# EAGLE board tractor_1v6 (EAGLE 9.0.1)
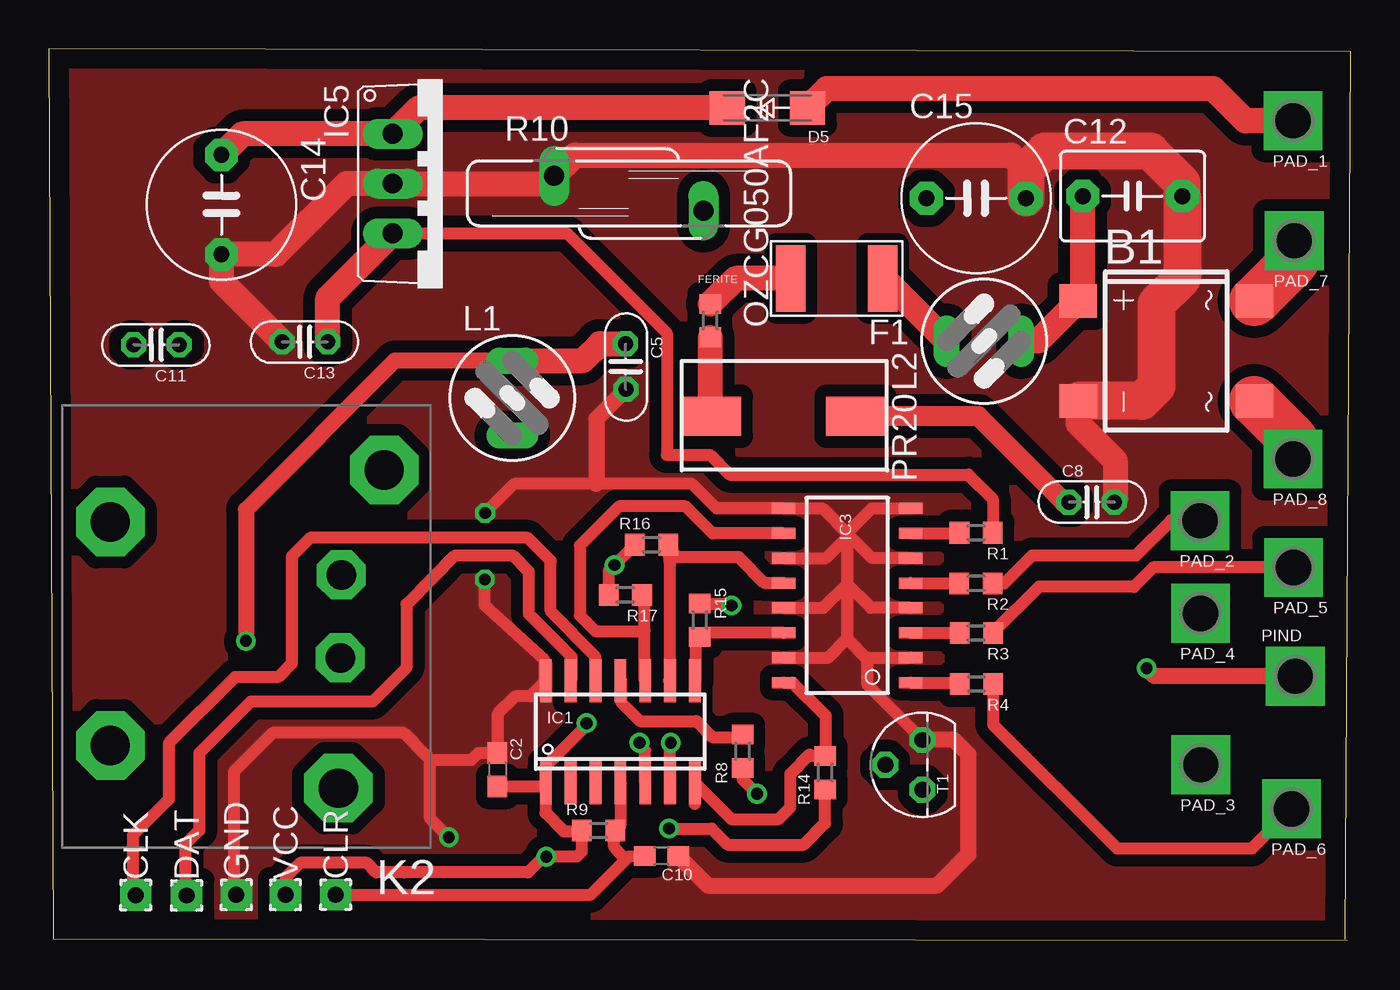
[diagram p0: board, top side]
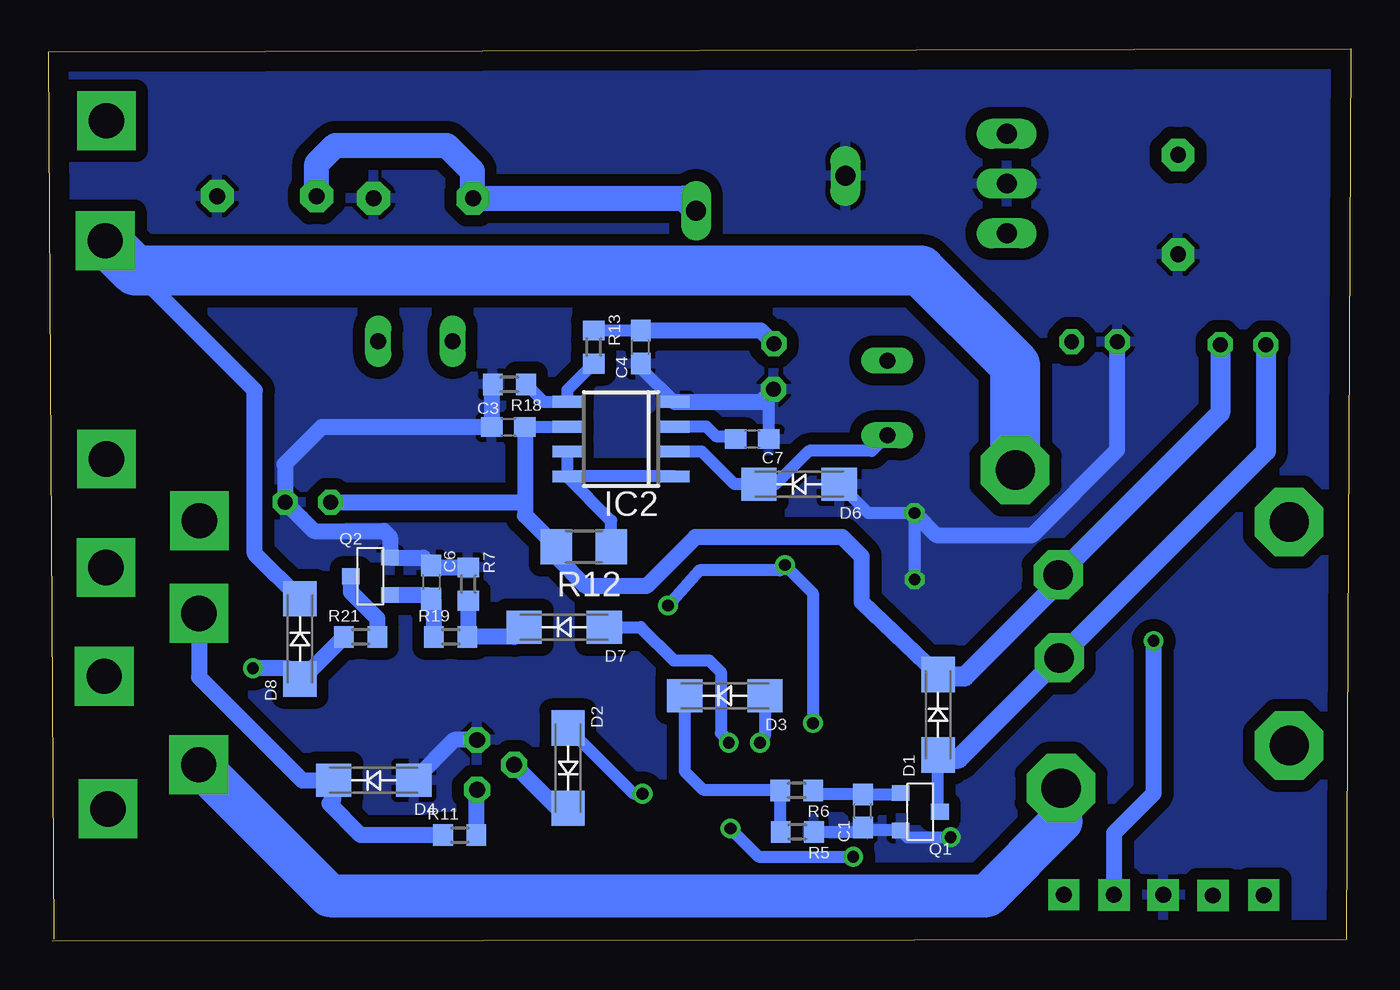
[diagram p1: board, bottom side, seen from below]

Size 66.48 x 45.52 mm. Coordinates in mm from the lower left corner, seen from the top.
Outline: 66.22,0.06 66.48,45.37 0,45.52 0.22,0.06 66.32,0
Copper layers (1*16): Top 0.035mm / dielectric 1.5mm / Bottom 0.035mm
Design rules "default": minimum track width 10mil, minimum drill 24mil, track to track 8mil, track to pad 8mil, pad to pad 8mil, via to via 8mil, smd to smd 8mil, copper to edge 40mil, drill to drill 8mil, minimum pad ring 10mil, minimum via ring 8mil, stop-mask expansion 4mil, vias tented up to drill 0mil, thermal gap 10mil

## Footprints (pad centres in the part's own frame; a part is rotated, then mirrored left to right if it is on the bottom)
DBS = smd 1.7 x 1.9: + -2.55,-4.5; - 2.55,-4.5; AC1 -2.55,4.5; AC2 2.55,4.5
C0603 = smd 1.1 x 1: 1 -0.85,0; 2 0.85,0
C025-025X050 = drill 0.762 pad 1.27 octagon: 1 -1.176,-0.006; 2 1.159,0.007
C050-045X075 = drill 0.813 pad 1.676 octagon: 1 -2.54,0; 2 2.54,0
C050-075X075 = drill 0.813 pad 1.676 octagon: 1 -2.54,0; 2 2.54,0
1,6/0,8 = drill 0.813 pad 1.6 square: 1 0,0
SMA-DO214AC = smd 1.8 x 1.7: A -2.05,0; K 2.05,0
RES_FUSE = smd 1.5 x 3.4: 1 -2.324,-0.11; 2 2.376,-0.11
R0603 = smd 1 x 1.1: 1 -0.85,0; 2 0.85,0
SO-14 = smd 0.6 x 2.2: 1 -3.81,-2.6; 2 -2.54,-2.6; 3 -1.27,-2.6; 4 0,-2.6; 5 1.27,-2.6; 6 2.54,-2.6; 7 3.81,-2.6; 8 3.81,2.6; 9 2.54,2.6; 10 1.27,2.6; 11 0,2.6; 12 -1.27,2.6; 13 -2.54,2.6; 14 -3.81,2.6
D_R-PDSO-G8 = smd 0.6 x 1.5: 1 -1.905,-2.75; 2 -0.635,-2.75; 3 0.635,-2.75; 4 1.905,-2.75; 5 1.905,2.75; 6 0.635,2.75; 7 -0.635,2.75; 8 -1.905,2.75
MINI-FLAT-16 = smd 1.2 x 0.56: 1 -3.24,4.445; 2 -3.24,3.175; 3 -3.24,1.905; 4 -3.24,0.635; 5 -3.24,-0.635; 6 -3.24,-1.905; 7 -3.24,-3.175; 8 -3.24,-4.445; 9 3.24,-4.445; 10 3.24,-3.175; 11 3.24,-1.905; 12 3.24,-0.635; 13 3.24,0.635; 14 3.24,1.905; 15 3.24,3.175; 16 3.24,4.445
TO220V = drill 1.016 long: 1 -2.54,-2.54; 2 0,-2.54; 3 2.54,-2.54
RL703 = drill 1.5 pad 2.5 octagon: 1 1.73,-5.643; 2 -2.51,-5.693 | drill 2 pad 3.5 octagon: C1 8.38,-5.543; C2 6.2,6.107; C3 -5.21,6.107; NO -7.86,-7.883
82114R = drill 0.813 long: 1 0,1.905; 2 0,-1.905
2,54/1,1 = drill 1.8 pad 3 square: 1 0,0
WSC2515 = smd 3 x 2: 1 -3.575,-0.1; 2 3.775,-0.1
MICRO3 = smd 0.8 x 0.9: 1 -0.95,-1; 2 0.95,-1; 3 0,1
S14K17 = drill 1.016 long: 1 -0.889,-3.81; 2 0.889,3.81
R3216 = smd 1.6 x 1.8: 1 -1.4,0; 2 1.4,0
TO92 = drill 0.813 octagon: 1 1.27,0; 2 0,1.905; 3 -1.27,0

## Placement (x,y rotation side)
B1  DB157LS  [DBS]  57.06,30.1 270 top
C1  1nf  [C0603]  24.91,6.62 90 bottom
C2  100nf  [C0603]  22.91,8.73 270 top
C3  0.01uf  [C0603]  43.02,26.22 0 bottom
C4  0.01uF  [C0603]  36.26,30.3 90 bottom
C5  220uf  [C025-025X050]  29.46,29.3 270 top
C6  1nf  [C0603]  46.96,18.3 270 bottom
C7  470pf  [C0603]  30.56,25.6 180 bottom
C8  100uf  [C025-025X050]  53.26,22.38 0 top
C10  10uf  [C0603]  31.28,4.32 180 top
C11  220uf  [C025-025X050]  5.48,30.42 180 top
C12  4nf  [C050-045X075]  55.34,38.01 0 top
C13  220uf  [C025-025X050]  13.07,30.57 180 top
C14  470uf  [C050-075X075]  8.81,37.57 270 top
C15  470uf  [C050-075X075]  47.36,37.9 0 top
CLK  [1,6/0,8]  4.43,2.32 0 top
CLR  [1,6/0,8]  14.64,2.34 0 top
D1  LL4148  [SMA-DO214AC]  21.06,11.53 90 bottom
D2  Fm4007  [SMA-DO214AC]  39.96,8.8 270 bottom
D3  Fm4007  [SMA-DO214AC]  31.96,12.5 180 bottom
D4  Fm4007  [SMA-DO214AC]  49.89,8.18 180 bottom
D5  Fm4007  [SMA-DO214AC]  36.69,42.51 180 top
D6  1N5819  [SMA-DO214AC]  28.16,23.3 180 bottom
D7  Fm4007  [SMA-DO214AC]  40.16,16 180 bottom
D8  Fm4007  [SMA-DO214AC]  53.66,15.4 90 bottom
DAT  [1,6/0,8]  7.03,2.3 0 top
F1  OZCG050AF2C  [RES_FUSE]  40.26,33.7 180 top
FERITE  FB MH1608HM151-T  [R0603]  33.77,31.65 270 top
GND  [1,6/0,8]  9.57,2.33 0 top
IC1  PIC16F1824  [SO-14]  29.18,10.67 0 top
IC2  33063A  [D_R-PDSO-G8]  37.26,25.6 90 bottom
IC3  [MINI-FLAT-16]  40.77,17.62 180 top
IC5  7812TV  [TO220V]  20.1,38.65 270 top
K2  RL703  [RL703]  9.24,16.16 270 bottom
L1  3.3uH  [82114R]  23.66,27.7 0 top
L2  3.3uH  [82114R]  47.76,30.6 90 top
PAD_1  [2,54/1,1]  63.55,41.86 180 top
PAD_2  [2,54/1,1]  58.79,21.44 180 top
PAD_3  [2,54/1,1]  58.83,8.98 180 top
PAD_4  [2,54/1,1]  58.81,16.71 180 top
PAD_5  [2,54/1,1]  63.57,19.06 180 top
PAD_6  [2,54/1,1]  63.47,6.73 180 top
PAD_7  [2,54/1,1]  63.6,35.74 180 top
PAD_8  [2,54/1,1]  63.54,24.59 180 top
PIND  [2,54/1,1]  63.66,13.5 0 top
PR20  50  [WSC2515]  37.42,26.87 0 top
Q1  IRLML2402  [MICRO3]  21.98,6.58 270 bottom
Q2  IRLML2402  [MICRO3]  50.06,18.6 90 bottom
R1  1.5k  [R0603]  47.35,20.82 180 top
R2  1.5k  [R0603]  47.35,18.24 180 top
R3  1.5k  [R0603]  47.37,15.71 180 top
R4  1.5k  [R0603]  47.37,13.1 180 top
R5  10k  [R0603]  28.26,5.55 180 bottom
R6  10k  [R0603]  28.29,7.67 180 bottom
R7  10k  [R0603]  45.06,18.2 270 bottom
R8  470  [R0603]  35.43,9.67 90 top
R9  10K  [R0603]  28.07,5.62 0 top
R10  S20K17  [S14K17]  29.61,38.15 270 top
R11  100  [R0603]  45.5,5.39 0 bottom
R12  330m  [R3216]  39.16,20.1 180 bottom
R13  3.6k  [R0603]  38.66,30.3 270 bottom
R14  4.5K  [R0603]  39.64,8.58 90 top
R15  4.5k  [R0603]  33.24,16.36 270 top
R16  4.5k  [R0603]  30.77,20.21 0 top
R17  4.5k  [R0603]  29.44,17.66 180 top
R18  1.2k  [R0603]  42.96,28.4 180 bottom
R19  10k  [R0603]  45.96,15.5 0 bottom
R21  1.5k  [R0603]  50.56,15.5 0 bottom
T1  BC547  [TO92]  44.62,8.97 90 top
VCC  [1,6/0,8]  12.08,2.33 0 top

## Library data of the parts
B1 = rectifier
C1-C4 C6 C7 C10 = eagle-ltspice; SPICEMODEL: NONE; SPICEPREFIX: C
C5 C8 C11-C13 = rcl
C14 C15 FERITE PR20 = resistor
CLK CLR DAT GND PAD_1-PAD_8 PIND VCC = wirepad
D1-D8 = diode
F1 = fuse
IC1 = microchip
IC2 IC5 = linear
IC3 = optocoupler; OC_FARNELL: unknown; OC_NEWARK: unknown
K2 = relay
L1 L2 = inductors; SPICEPREFIX: L
Q1 Q2 = transistor-power
R1-R9 R11-R19 R21 = eagle-ltspice; SPICEMODEL: NONE; SPICEPREFIX: R
R10 = varistor
T1 = transistor-neu-to92

## Nets
12V_8: B1.AC1 D8.K K2.NO PAD_7.1
BUZZ_4: D4.K PAD_4.1 R11.1
ENG: D5.A PAD_1.1
GND: B1.- C1.1 C2.1 C3.1 C4.1 C5.2 C6.1 C7.1 C8.2 C10.1 C12.2 C13.2 C14.2 C15.2 D4.A D6.A GND.1 IC1.14 IC2.4 IC3.2 IC3.4 IC3.6 IC3.8 IC3.9 IC3.11 IC3.13 IC3.15 IC5.2 Q1.2 Q2.2 R5.1 R7.1 R10.1 R18.2 T1.1
HB_2: PAD_2.1 R2.1
N$1: B1.AC2 PAD_8.1
N$3: IC1.10 IC3.10 R17.1
N$5: C11.2 D1.A K2.1 Q1.3
N$7: D2.A R8.1
N$8: DAT.1 IC1.13
N$9: CLK.1 IC1.12
N$13: C14.1 D5.K IC5.1
N$14: D2.K T1.2
N$15: FERITE.2 PR20.1
N$16: C13.1 IC5.3 R1.1
N$17: D3.A IC1.5
N$18: IC2.1 IC2.7 IC2.8 R12.1
N$19: C7.2 IC2.3
N$20: F1.2 FERITE.1
N$21: F1.1 L2.1
N$22: D6.K IC2.2 L1.2
N$23: IC2.5 R13.2 R18.1
N$24: C6.2 Q2.1 R19.1
N$25: Q2.3 R21.2
N$26: D7.K R7.2 R19.2
N$27: D7.A IC1.6
N$28: D8.A PIND.1 R21.1
N$29: B1.+ C12.1 C15.1 L2.2 R10.2
N$72: C1.2 Q1.1 R6.1
N$74: D3.K R5.2 R6.2
N$76: IC3.1 R4.2
N$78: IC3.3 R3.2
N$80: IC3.5 R2.2
N$82: IC3.7 R1.2
N$84: IC1.9 IC3.12 R16.2
N$85: IC1.8 IC3.14 R15.2
N$86: IC1.7 IC3.16 R14.2
N$87: C10.2 CLR.1 IC1.4 R9.2
N$88: IC1.11 R8.2
N$90: R11.2 T1.3
PTO_5: PAD_5.1 R3.1
R_3: K2.C1 PAD_3.1
SS_6: PAD_6.1 R4.1
VCC: C2.2 C4.2 C5.1 IC1.1 L1.1 R9.1 R13.1 R14.1 R15.1 R16.1 R17.2 VCC.1
VDD: C3.2 C8.1 C11.1 D1.K IC2.6 K2.2 PR20.2 R12.2

## Tracks (layer width: path | path; a pad name or v marks a point on that pad's centre or on a via)
12V_8
  Top 2.54: B1.AC1 63.6,34.7 PAD_7.1
  Bottom 0.813: 62.07,34.2 55.96,28.09 55.96,19.75 D8.K
  Bottom 2.54: K2.NO 17.12,29.37 21.96,34.2 62.07,34.2 PAD_7.1
BUZZ_4
  Bottom 0.813: R11.1 50.55,5.39 52.16,7 51.94,7.22 D4.K 53.54,8.18 58.81,13.46 PAD_4.1
ENG
  Top 1.27: PAD_1.1 61.11,41.86 59.46,43.5 39.73,43.5 D5.A
GND  (via drill 0.6)
  Top 0.61: 19.48,9.22 19.29,9.4 19.29,9.44 18.13,10.6 11.43,10.6 9.44,8.61 9.44,2.46 GND.1 | v22.27,18.44 v22.26,18.43 22.26,17.12 25.31,14.33 25.31,13.34 IC1.14 24.58,12.47 23.82,12.47 22.92,11.57 22.92,9.59 C2.1 21.92,9.58 21.57,9.22 19.48,9.22 | v22.27,21.83 23.76,23.32 27.96,23.32 32.84,23.32 34.1,22.07 IC3.9 39.5,22.07 40.76,20.8 | 40.76,20.8 42.02,22.07 IC3.8 | 40.76,20.8 40.76,20.6 | 40.76,20.6 40.76,18.2 | 40.76,18.2 40.76,15.4 | 40.76,15.4 41.76,14.4 41.8,14.45 | 41.8,14.45 IC3.2 | IC3.15 39.8,14.45 40.76,15.4 | IC3.13 39.54,16.99 40.76,18.2 | IC3.4 41.98,16.99 40.76,18.2 | IC3.11 39.68,19.53 40.76,20.6 | IC3.6 42.04,19.53 40.76,20.8 | T1.1 41.8,13.06 41.8,14.45 | v20.42,5.27 19.48,6.22 19.48,9.22
  Top 0.813: C10.1 33.65,2.8 45.36,2.8 46.96,4.4 46.96,9.5 46.22,10.24 T1.1 | C5.2 27.96,26.64 27.96,23.32
  Top 1.27: C13.2 8.81,33.67 C14.2 11.59,35.03 15.21,38.65 IC5.2 25.41,38.65 arc90 R10.1 26.86,40.1 49.14,40.1 49.9,39.34 | B1.- 52.56,26.4 54.46,24.5 54.46,22.43 C8.2
  Top 1.9: C12.2 57.88,38.68 56.26,40.3 50.86,40.3 49.9,39.34 C15.2
  Top 1.93: C12.2 57.88,33.82 56.56,32.5 56.56,28.3 55.81,27.55 B1.-
  Bottom 0.61: R5.1 25.12,5.55 C1.1 24.77,5.63 Q1.2 22.62,5.27 v20.42,5.27 | v22.27,18.44 22.27,18.7 v22.27,21.83 24.64,21.83 D6.A | C7.1 29.71,27.9 C5.2 | C4.1 36.26,29.26 IC2.4
  Bottom 0.813: v22.27,21.83 21.14,20.7 16.26,20.7 11.91,25.05 C13.2 | T1.1 45.78,10.24 D4.A | R18.2 43.87,28.35 C3.1 52.55,26.22 54.46,24.3 54.42,24.26 C8.2 52.93,20.9 49.36,20.9 49.06,20.6 Q2.2 47.36,19.55 C6.1 46.86,19.05 R7.1 | IC2.4 30.1,27.51 29.71,27.9
  pour Top (isolate 0.61, no thermals): -0.24,45.4 66.66,45.4 66.66,-0.4 -0.24,-0.4
  pour Bottom (isolate 0.61): -0.14,45.4 66.36,45.4 66.46,-0.4 -0.14,-0.4
HB_2
  Top 0.61: 48.23,18.27 R2.1 48.79,18.24 50.22,19.67 55.52,19.67 57.32,21.47 58.75,21.47 PAD_2.1
N$1
  Top 2.54: B1.AC2 63.54,25.57 PAD_8.1
N$3
  Top 0.61: IC1.10 30.42,13.3 30.42,15.82 | 30.42,15.82 30.42,17.53 R17.1 | IC3.10 33.9,20.8 32.52,22.17 29.12,22.17 27.12,20.17 27.12,16.59 27.91,15.8 30.4,15.8 30.42,15.82
N$5
  Bottom 0.61: Q1.3 20.92,6.64 21.07,6.78 D1.A 20.92,9.14
  Bottom 1.016: D1.A 21.05,9.29 20.02,9.29 K2.1 4.32,25 C11.2
N$7  (via drill 0.6)
  Top 0.61: R8.1 35.43,8.23 v36.16,7.5
  Bottom 0.61: D2.A 36.61,7.5 v36.16,7.5
N$8
  Top 0.61: 19.61,18.51 19.61,18.52 | 19.61,18.52 20.75,19.66 23.67,19.66 24.5,18.83 24.5,16.68 26.68,14.5 26.68,13.31 IC1.13 | 19.61,18.52 19.6,18.52 18.26,17.18 18.26,13.93 16.53,12.2 10.31,12.2 7.68,9.57 7.68,5.63 6.97,4.92 6.97,2.36 DAT.1
N$9
  Top 0.61: IC1.12 27.91,14.49 26.73,15.67 26.73,15.7 26.24,16.19 26.24,16.21 25.63,16.82 25.63,19.38 24.45,20.56 13.34,20.56 12.4,19.62 12.4,14.15 11.7,13.45 9.5,13.45 6.12,10.07 6.12,7.21 4.28,5.37 4.28,2.47 CLK.1
N$13
  Top 1.27: C14.1 9.89,41.19 IC5.1 18.88,42.51 D5.K
N$14
  Bottom 0.813: D2.K 40.49,6.75 T1.2
N$15
  Top 1.27: FERITE.2 33.77,26.85 PR20.1
N$16
  Top 0.61: R1.1 48.21,22.55 46.97,23.79 34.76,23.79 33.75,24.8 31.56,24.8 31.56,31 26.45,36.11 IC5.3
  Top 1.27: C13.1 14.25,32.8 IC5.3
N$17  (via drill 0.6)
  Top 0.61: IC1.5 30.45,9.71 v30.16,10.1
  Bottom 0.61: D3.A 29.91,10.45 v30.16,10.1
N$18
  Bottom 0.61: IC2.7 IC2.8 | R12.1 37.76,21.45 IC2.8 | IC2.1 IC2.8
N$19
  Bottom 0.61: IC2.3 32.89,26.24 32.41,25.75 31.56,25.75 C7.2
N$20
  Top 1.27: F1.2 35.08,33.81 FERITE.1
N$21
  Top 1.27: L2.1 42.64,33.81 F1.1
N$22
  Bottom 0.61: IC2.2 33.12,24.97 31.46,23.3 D6.K 29.36,23.3 27.66,25 24.46,25 L1.2
N$23
  Bottom 0.61: R18.1 41.21,27.51 IC2.5 40.01,28.1 R13.2
N$24
  Bottom 0.813: Q2.1 47.16,17.65 C6.2 46.81,17.3 R19.1
N$25
  Bottom 0.813: Q2.3 51.06,17.8 49.71,16.45 R21.2
N$26
  Bottom 0.813: D7.K 42.71,15.5 R19.2 45.06,15.55 R7.2
N$27  (via drill 0.6)
  Top 0.61: IC1.6 31.72,10.17 v31.76,10.1
  Bottom 0.61: D7.A 36.26,16 34.56,14.3 32.76,14.3 32.16,13.7 32.16,10.6 v31.76,10.1
  Bottom 0.813: D7.A 37.71,15.6
N$28  (via drill 0.6)
  Top 0.813: PIND.1 56.46,13.5 v56.06,13.9
  Bottom 0.813: R21.1 53.56,13.35 D8.A 54.21,13.9 v56.06,13.9
N$29
  Top 1.27: C12.1 52.8,32.89 B1.+ 50.51,30.6 L2.2
  Bottom 1.27: C12.1 52.8,39.66 51.86,40.6 46.16,40.6 44.86,39.3 44.86,37.94 C15.1 34.06,37.9 R10.2
N$72
  Bottom 0.61: R6.1 27.34,7.47 C1.2 23.04,7.47 Q1.1
N$74
  Bottom 0.61: R5.2 29.11,7.53 R6.2 29.17,7.7 33.06,7.7 34.01,8.65 D3.K
N$76
  Top 0.61: IC3.1 46.44,13.18 R4.2
N$78
  Top 0.61: IC3.3 46.5,15.72 R3.2
N$80
  Top 0.61: IC3.5 46.48,18.26 R2.2
N$82
  Top 0.61: IC3.7 46.47,20.8 R1.2
N$84
  Top 0.61: 31.66,13.27 IC1.9 31.72,19.21 R16.2 32.09,19.57 35.23,19.57 36.55,18.26 IC3.12
N$85
  Top 0.61: IC1.8 33.04,13.27 33.04,15.31 R15.2 | 33.23,15.72 R15.2 | IC3.14 33.45,15.72 R15.2
N$86
  Top 0.61: 32.99,8.85 IC1.7 | IC1.7 32.99,6.97 | IC3.16 37.99,13.18 39.66,11.5 39.66,9.44 | 39.66,9.44 R14.2 | IC1.7 34.86,6.2 37.26,6.2 37.86,6.8 37.86,8.5 38.86,9.5 38.92,9.44 39.66,9.44
N$87
  Top 0.61: IC1.4 29.18,5.89 R9.2 28.87,5.58 28.87,4.78 29.32,4.26 29.61,4.28 | C10.2 29.61,4.28 | 29.61,4.28 27.67,2.34 18.16,2.34 CLR.1
N$88
  Top 0.61: IC1.11 29.22,13.23 29.22,12.17 30.19,11.2 33.06,11.2 33.88,10.39 35.3,10.39 R8.2
N$90
  Bottom 0.813: R11.2 44.65,7.68 T1.3
PTO_5
  Top 0.61: R3.1 50.58,18.07 50.59,18.06 55.41,18.06 56.4,19.06 PAD_5.1
R_3
  Bottom 1.93: PAD_3.1 58.62,8.77 58.62,8.57
  Bottom 2.2: 58.62,8.77 52.15,2.3 18.56,2.3 14.78,6.08 K2.C1
SS_6
  Top 0.61: 48.35,12.97 R4.1 48.22,11.04 54.56,4.7 61.44,4.7 PAD_6.1
VCC  (via drill 0.6)
  Top 0.61: C2.2 25.18,7.88 25.36,8.05 | 27.19,5.59 R9.1 | 25.36,8.05 IC1.1 25.37,8.92 26.13,9.68 27.46,11 v27.46,11.1 | R9.1 | 25.36,8.05 25.36,6.52 26.29,5.58 27.18,5.58 R9.1 | R9.1 27.22,5.61 27.21,5.61 27.21,4.54 26.95,4.29 v25.4,4.29 | v25.4,4.29 v25.4,4.28 | v25.4,4.29 25.26,4.29 24.46,3.48 18.16,3.48 16.72,3.48 16.24,3.96 12.83,3.96 12.09,3.22 VCC.1 | R16.1 v28.89,19.18 28.59,18.88 R17.2 | R15.1 34.53,17.2 v34.86,17.1 | v31.67,5.72 33.84,5.72 34.66,4.9 38.56,4.9 39.64,5.99 R14.1
  Top 0.813: v10.06,15.3 10.06,22 17.66,29.61 L1.1
  Top 1.27: L1.1 27.27,29.61 28.14,30.48 C5.1
  Bottom 0.61: 25.56,4.12 v25.4,4.28 30.23,4.28 v31.67,5.72 | v34.86,17.1 33.26,18.9 29.16,18.9 v28.89,19.18 27.46,17.75 v27.46,11.1 27.46,11 | R13.1 C4.2
  Bottom 0.813: v10.06,15.3 10.06,7.5 12.08,5.48 VCC.1 | C4.2 30.13,31.15 C5.1
VDD
  Top 1.016: PR20.2 47.46,26.77 51.86,22.38 C8.1
  Bottom 0.61: IC2.6 40.03,26.22 C3.2
  Bottom 0.813: D1.K 24.96,17.28 24.96,19.6 25.96,20.6 33.46,20.6 35.96,18.1 39.06,18.1 40.56,19.6 R12.2 42.17,21.71 42.17,22.6 | C3.2 42.17,22.6 | C8.1 42.39,22.38 42.17,22.6
  Bottom 1.016: D1.K 20.96,13.48 19.72,13.48 14.93,18.27 K2.2 6.66,26.95 C11.1